# Altium PCB SSR CIRCUIT.PcbDoc
Units mm, origin at the board's own origin, x right, y up, seen from the top; angles counter-clockwise.
Board outline 150.88 x 88.77 mm, 2 copper layers (Top Layer, Bottom Layer); 40 components, 10 nets, 92 pads, 0 vias.
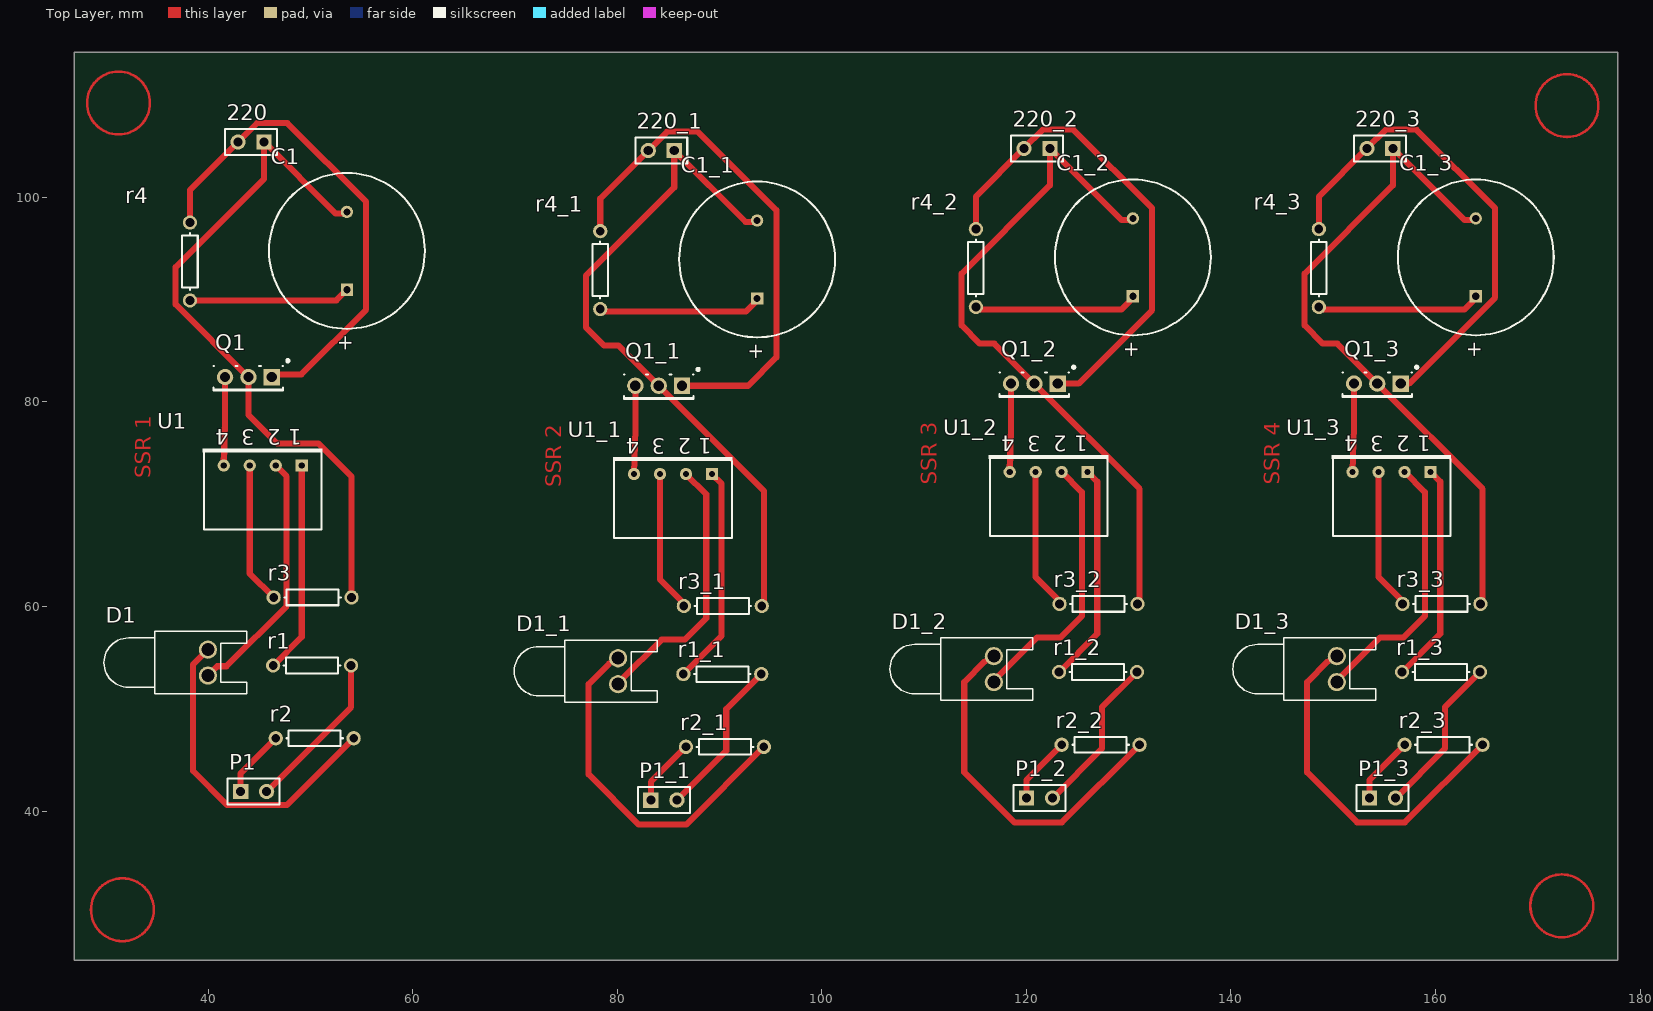
[diagram p0: Top Layer view]
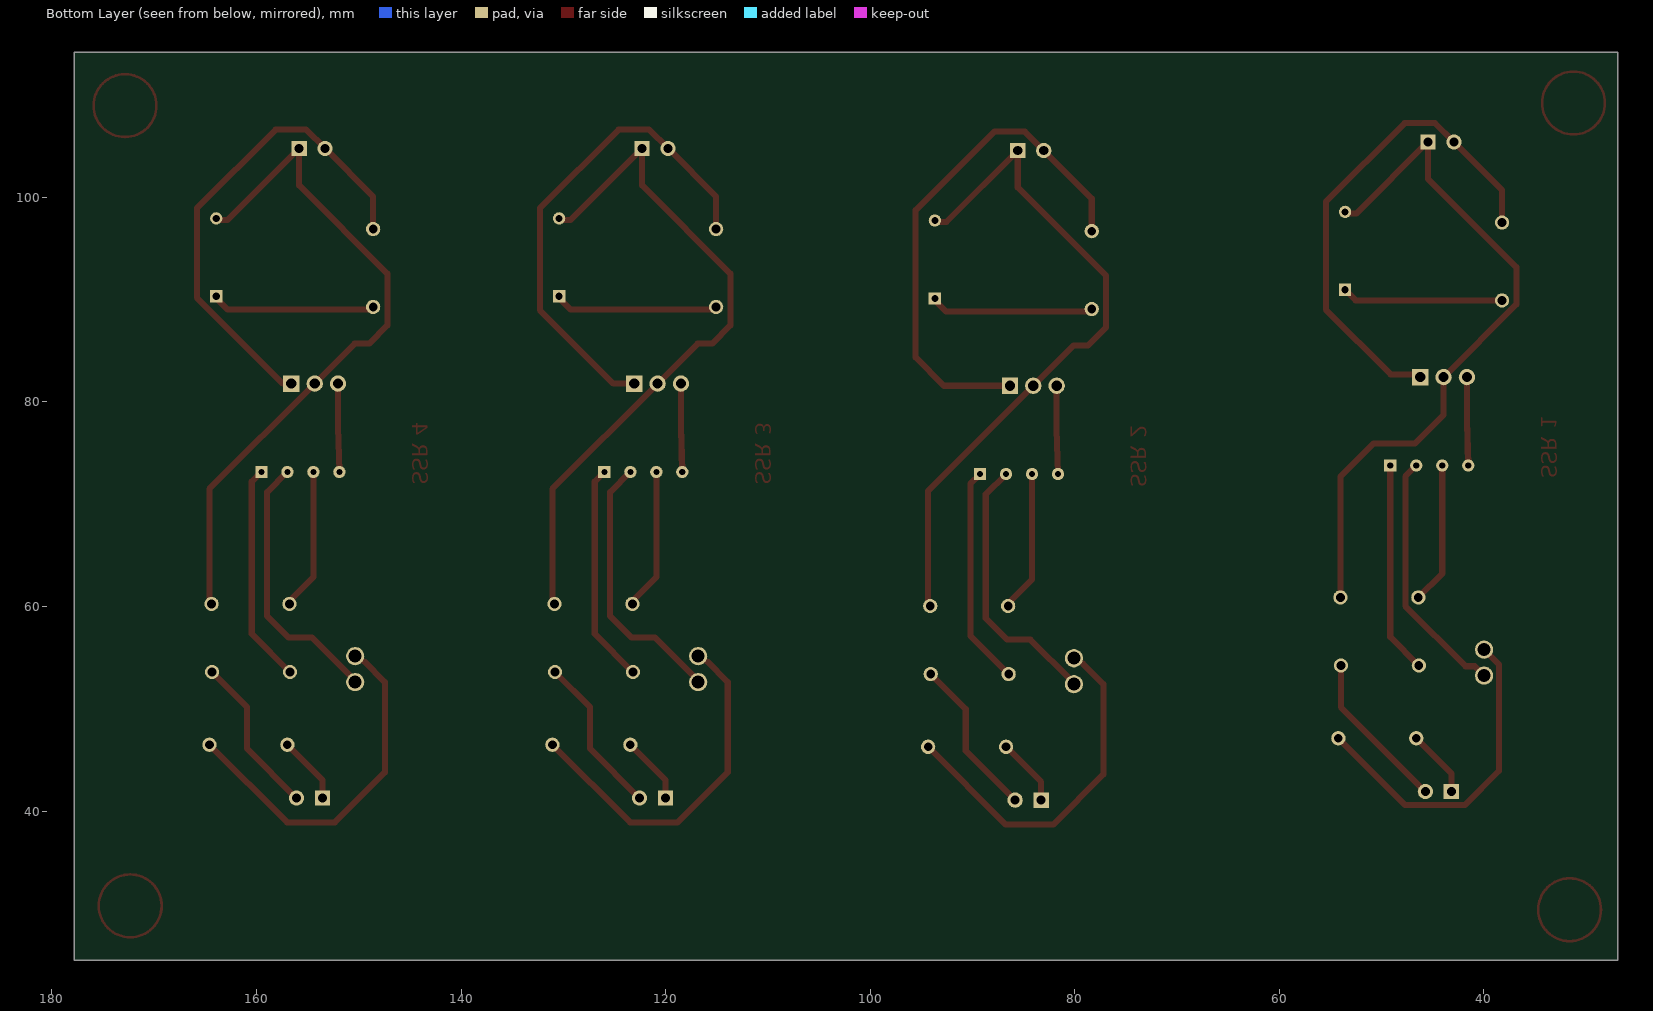
[diagram p1: Bottom Layer view, seen from below]

## Layer stack, top to bottom
Top Solder: solder mask 0.0102, Solder Resist, Dk 3.5
Top Layer: signal copper 0.0356
Dielectric 1: dielectric 0.32, FR-4, Dk 4.8
Bottom Layer: signal copper 0.0356
Bottom Solder: solder mask 0.0102, Solder Resist, Dk 3.5

## Board outline
26.924,25.4 101.727,25.4 177.8,25.4 177.8,114.173 26.924,114.173

## Design rules (kind name [scope] priority, off if disabled: settings)
Clearance [All] p1: gap=0.254
PolygonConnect [All] p1: connectstyle=Relief reliefconductorwidth=0.254 reliefentries=4 polygonreliefangle="90 Angle" airgapwidth=0.254
RoutingLayers [All] p1: top layer_v5=TRUE bottom layer_v5=FALSE
RoutingVias [All] p1: holewidth=0.711 width=1.27 viastyle="Through Hole" minholewidth=0.711 minwidth=1.27 maxholewidth=0.711 maxwidth=1.27
SolderMaskExpansion [All] p1: expansion=0.102
UnpouredPolygon [All] p1: allowunpoured=FALSE
Width [All] p1: maxlimit=0.6 minlimit=0.6 preferedwidth=0.6
28 further rules are at their usual default settings.

## Classes and differential pairs
component class Sheet1: 220 C1 D1 P1 Q1 r1 r2 r3 r4 U1

## Components (designator, comment, footprint, x,y, rotation, side; value= is the part's Value field where it differs from the comment)
220 "Header 2" HDR1X2 45.466,105.41 r180 top
220_1 "Header 2" HDR1X2 85.573,104.572 r180 top (schematic designator 220)
220_2 "Header 2" HDR1X2 122.301,104.775 r180 top (schematic designator 220)
220_3 "Header 2" HDR1X2 155.829,104.775 r180 top (schematic designator 220)
C1 "Cap Pol1" RB7.6-15 53.569,94.767 r270 top
C1_1 "Cap Pol1" RB7.6-15 93.675,93.929 r270 top (schematic designator C1)
C1_2 "Cap Pol1" RB7.6-15 130.404,94.132 r270 top (schematic designator C1)
C1_3 "Cap Pol1" RB7.6-15 163.932,94.132 r270 top (schematic designator C1)
D1 "LED0" LED-0 39.98,54.508 r270 top
D1_1 "LED0" LED-0 80.086,53.67 r270 top (schematic designator D1)
D1_2 "LED0" LED-0 116.815,53.873 r270 top (schematic designator D1)
D1_3 "LED0" LED-0 150.343,53.873 r270 top (schematic designator D1)
P1 "Header 2" HDR1X2 43.18,41.91 r0 top
P1_1 "Header 2" HDR1X2 83.287,41.072 r0 top (schematic designator P1)
P1_2 "Header 2" HDR1X2 120.015,41.275 r0 top (schematic designator P1)
P1_3 "Header 2" HDR1X2 153.543,41.275 r0 top (schematic designator P1)
Q1 "Triac" 369-03 43.942,82.423 r180 top
Q1_1 "Triac" 369-03 84.049,81.585 r180 top (schematic designator Q1)
Q1_2 "Triac" 369-03 120.777,81.788 r180 top (schematic designator Q1)
Q1_3 "Triac" 369-03 154.305,81.788 r180 top (schematic designator Q1)
r1 "Res1" AXIAL-0.3 50.165,54.229 r180 top
r1_1 "Res1" AXIAL-0.3 90.272,53.391 r180 top (schematic designator r1)
r1_2 "Res1" AXIAL-0.3 127,53.594 r180 top (schematic designator r1)
r1_3 "Res1" AXIAL-0.3 160.528,53.594 r180 top (schematic designator r1)
r2 "Res1" AXIAL-0.3 50.419,47.117 r180 top
r2_1 "Res1" AXIAL-0.3 90.526,46.279 r180 top (schematic designator r2)
r2_2 "Res1" AXIAL-0.3 127.254,46.482 r180 top (schematic designator r2)
r2_3 "Res1" AXIAL-0.3 160.782,46.482 r180 top (schematic designator r2)
r3 "Res1" AXIAL-0.3 50.216,60.884 r0 top
r3_1 "Res1" AXIAL-0.3 90.322,60.046 r0 top (schematic designator r3)
r3_2 "Res1" AXIAL-0.3 127.051,60.249 r0 top (schematic designator r3)
r3_3 "Res1" AXIAL-0.3 160.579,60.249 r0 top (schematic designator r3)
r4 "Res1" AXIAL-0.3 38.227,93.726 r270 top
r4_1 "Res1" AXIAL-0.3 78.334,92.888 r270 top (schematic designator r4)
r4_2 "Res1" AXIAL-0.3 115.062,93.091 r270 top (schematic designator r4)
r4_3 "Res1" AXIAL-0.3 148.59,93.091 r270 top (schematic designator r4)
U1 "Opto TRIAC" NPSIP4A 45.339,73.787 r180 top
U1_1 "Opto TRIAC" NPSIP4A 85.446,72.949 r180 top (schematic designator U1)
U1_2 "Opto TRIAC" NPSIP4A 122.174,73.152 r180 top (schematic designator U1)
U1_3 "Opto TRIAC" NPSIP4A 155.702,73.152 r180 top (schematic designator U1)

## Footprints (in the part's own frame and the unit in brackets; to place one, negate y for a bottom-side part, rotate by r counter-clockwise, add the part's x,y. Pads: shape width x height; smd on the part's side, far side on the other; paste and mask are expansions set on the pad)
369-03 [mm] "TO, Thru-Hole, Vertical, Heatsink Mounted; 3 In-Line Leads; Pitch 2.28 mm"
  rect 1.6x1.6 hole 1: 1(-2.28,0)
  round 1.6 hole 1: 2(0,0) 3(2.28,0)
  silkscreen extent -3.98,-1.72 3.4,1.3, body extent -3.45,-1.15 3.45,1.35, height 9.7
AXIAL-0.3 [mm] "Axial Device, Thru-Hole; 2 Leads; 0.3 in Pin Spacing"
  round 1.4 hole 0.85: 1(-3.81,0) 2(3.81,0)
  silkscreen extent -2.77,-0.76 2.77,0.76
HDR1X2 [mm] "Connector; Header; 2 Position"
  rect 1.5x1.5 hole 0.9: 1(0,0)
  round 1.5 hole 0.9: 2(2.54,0)
  silkscreen extent -1.27,-1.27 3.81,1.27
LED-0 [mil] "LED; 2 Leads"
  round 70 hole 50: 1(50,0) 2(-50,0)
  silkscreen extent -120,-400 120,150
NPSIP4A [mm] "SIP; 4 Leads; Body 10 x 11.5 x 7.5 mm (typ); Pitch 2.54 mm"
  rect 1.2x1.2 hole 0.6: 1(-3.81,0)
  round 1.2 hole 0.6: 2(-1.27,0) 3(1.27,0) 4(3.81,0)
  silkscreen extent -5.83,-1.65 5.87,6.25
RB7.6-15 [mm] "Polarized Capacitor (Radial); 2 Leads"
  rect 1.2x1.2 hole 0.7: 1(3.81,0)
  round 1.2 hole 0.7: 2(-3.81,0)
  silkscreen extent -7.62,-7.62 7.62,7.62

## Part data
220 220_1 220_2 220_3 P1 P1_1 P1_2 P1_3: "Header, 2-Pin"
C1 C1_1 C1_2 C1_3: "Polarized Capacitor (Radial)"
D1 D1_1 D1_2 D1_3: "Typical INFRARED GaAs LED"
Q1 Q1_1 Q1_2 Q1_3: "Silicon Bidirectional Triode Thyristor"
r1 r1_1 r1_2 r1_3 r2 r2_1 r2_2 r2_3 r3 r3_1 r3_2 r3_3 r4 r4_1 r4_2 r4_3: "Resistor"
U1 U1_1 U1_2 U1_3: "Opto-Triac"

## Nets (pads, with @x,y where several pads share a name; then routed paths per layer and width w, separated by ;. In a path a pad name is that pad's centre, name@x,y a point inside that pad or via, vN(x,y) a via of type N, cw(c..) or ccw(c..) an arc to the next point about the centre after c; other vN are vias at no path point)
Net220_1: 220.1 C1.2 Q1.2 r3.2 | length 68.8
  Top Layer w0.6: C1.2 53.594,98.577 53.594,98.425 52.451,98.425 220.1 45.466,101.803 36.83,93.167 36.83,89.535 Q1.2 43.942,78.74 46.761,75.921 50.8,75.921 54.026,72.695 r3.2
Net220_2: 220.2 Q1.1 r4.1 | length 48.8
  Top Layer w0.554: Q1.1 Q1.1@46.492,82.693
  Top Layer w0.6: r4.1 38.227,100.711 220.2 44.78,107.264 47.752,107.264 55.448,99.568 55.448,89.027 49.114,82.693 Q1.1@46.492,82.693
NetC1_1: C1.1 r4.2 | length 15.8
  Top Layer w0.6: r4.2 52.527,89.916 C1.1
NetD1_1: D1.1 U1.2 | length 24.7
  Top Layer w0.6: D1.1 40.894,54.153 41.783,54.153 47.676,60.046 47.676,72.72 U1.2
NetD1_2: D1.2 r2.1 | length 32.2
  Top Layer w0.6: D1.2 38.532,54.331 38.532,43.917 41.859,40.589 47.701,40.589 r2.1
NetP1_1: P1.1 r2.2 | length 6.6
  Top Layer w0.6: P1.1 43.18,43.688 r2.2
NetP1_2: P1.2 r1.1 | length 15.7
  Top Layer w0.6: P1.2 53.975,50.165 r1.1
NetQ1_3: Q1.3 U1.4 | length 8.6
  Top Layer w0.6: U1.4 41.662,78.238 Q1.3
Netr1_2: r1.2 U1.1 | length 20.7
  Top Layer w0.6: r1.2 49.149,57.023 U1.1
Netr3_1: r3.1 U1.3 | length 13.9
  Top Layer w0.6: U1.3 44.069,63.221 r3.1
pads on no net: 220_1.1 220_1.2 220_2.1 220_2.2 220_3.1 220_3.2 C1_1.1 C1_1.2 C1_2.1 C1_2.2 C1_3.1 C1_3.2 D1_1.1 D1_1.2 D1_2.1 D1_2.2 D1_3.1 D1_3.2 P1_1.1 P1_1.2 P1_2.1 P1_2.2 P1_3.1 P1_3.2 Q1_1.1 Q1_1.2 Q1_1.3 Q1_2.1 Q1_2.2 Q1_2.3 Q1_3.1 Q1_3.2 Q1_3.3 r1_1.1 r1_1.2 r1_2.1 r1_2.2 r1_3.1 r1_3.2 r2_1.1 r2_1.2 r2_2.1 r2_2.2 r2_3.1 r2_3.2 r3_1.1 r3_1.2 r3_2.1 r3_2.2 r3_3.1 r3_3.2 r4_1.1 r4_1.2 r4_2.1 r4_2.2 r4_3.1 r4_3.2 U1_1.1 U1_1.2 U1_1.3 U1_1.4 U1_2.1 U1_2.2 U1_2.3 U1_2.4 U1_3.1 U1_3.2 U1_3.3 U1_3.4
copper on no net: | length 853.3
  Top Layer w0.254: 34.314,109.22 ccw(c31.242,109.22) 34.314,109.22 ; 34.695,30.353 ccw(c31.623,30.353) 34.695,30.353 ; 175.411,30.734 ccw(c172.339,30.734) 175.411,30.734 ; 175.919,108.966 ccw(c172.847,108.966) 175.919,108.966
  Top Layer w0.6: 78.334,88.824 92.558,88.824 93.472,89.738 ; 78.334,96.444 78.334,99.873 83.033,104.572 84.887,106.426 87.859,106.426 95.555,98.73 95.555,84.353 92.786,81.585 86.329,81.585 ; 79.21,54.419 77.191,52.4 77.191,43.586 82.093,38.684 86.741,38.684 94.336,46.279 ; 79.756,52.73 80.289,52.73 84.328,56.769 86.614,56.769 88.697,58.852 88.697,70.968 86.716,72.949 ; 81.636,72.949 81.769,77.4 81.769,81.585 ; 83.287,41.072 83.287,42.85 86.716,46.279 ; 84.176,72.949 84.176,62.662 86.716,60.122 ; 85.827,41.072 90.653,45.898 90.653,49.962 94.082,53.391 ; 86.462,53.391 90.195,57.125 90.195,72.009 89.256,72.949 ; 93.701,97.587 92.558,97.587 85.573,104.572 85.573,100.965 76.937,92.329 76.937,87.274 78.715,85.496 80.137,85.496 84.049,81.585 94.336,71.298 94.336,60.122 ; 115.062,89.027 129.286,89.027 130.2,89.941 ; 115.062,96.647 115.062,100.076 119.761,104.775 121.615,106.629 124.587,106.629 132.283,98.933 132.283,88.976 125.095,81.788 123.057,81.788 ; 115.938,54.623 113.919,52.603 113.919,43.79 118.821,38.887 123.469,38.887 131.064,46.482 ; 116.484,52.934 117.018,52.934 121.056,56.972 123.342,56.972 125.425,59.055 125.425,71.171 123.444,73.152 ; 118.364,73.152 118.497,77.603 118.497,81.788 ; 120.015,41.275 120.015,43.053 123.444,46.482 ; 120.904,73.152 120.904,62.865 123.444,60.325 ; 122.555,41.275 127.381,46.101 127.381,50.165 130.81,53.594 ; 123.19,53.594 126.924,57.328 126.924,72.212 125.984,73.152 ; 130.429,97.79 129.286,97.79 122.301,104.775 122.301,101.168 113.665,92.532 113.665,87.478 115.443,85.7 116.865,85.7 120.777,81.788 131.064,71.501 131.064,60.325 ; 148.59,89.027 162.814,89.027 163.728,89.941 ; 148.59,96.647 148.59,100.076 153.289,104.775 155.143,106.629 158.115,106.629 165.811,98.933 165.811,90.195 157.404,81.788 156.585,81.788 ; 149.466,54.623 147.447,52.603 147.447,43.79 152.349,38.887 156.997,38.887 164.592,46.482 ; 150.012,52.934 150.546,52.934 154.584,56.972 156.87,56.972 158.953,59.055 158.953,71.171 156.972,73.152 ; 151.892,73.152 152.025,77.603 152.025,81.788 ; 153.543,41.275 153.543,43.053 156.972,46.482 ; 154.432,73.152 154.432,62.865 156.972,60.325 ; 156.083,41.275 160.909,46.101 160.909,50.165 164.338,53.594 ; 156.718,53.594 160.452,57.328 160.452,72.212 159.512,73.152 ; 163.957,97.79 162.814,97.79 155.829,104.775 155.829,101.168 147.193,92.532 147.193,87.478 148.971,85.7 150.393,85.7 154.305,81.788 164.592,71.501 164.592,60.325

## Other copper
Top Layer:
  text "SSR 1" at 34.417,72.517 h1.52 r90
  text "SSR 3" at 111.252,71.882 h1.52 r90
  text "SSR 4" at 144.78,71.882 h1.52 r90
  text "SSR 2" at 74.524,71.679 h1.52 r90

## Text inside footprints (layer, text, board x,y; h text height)
C1: Top Overlay "+" at 52.832,86.636 h1.5 r270
C1_1: Top Overlay "+" at 92.938,85.797 h1.5 r270
C1_2: Top Overlay "+" at 129.667,86.001 h1.5 r270
C1_3: Top Overlay "+" at 163.195,86.001 h1.5 r270
U1: Top Overlay "4" at 42.037,77.307 h1.5 r180; Top Overlay "3" at 44.577,77.307 h1.5 r180; Top Overlay "2" at 47.117,77.307 h1.5 r180; Top Overlay "1" at 49.149,77.307 h1.5 r180
U1_1: Top Overlay "4" at 82.144,76.469 h1.5 r180; Top Overlay "3" at 84.684,76.469 h1.5 r180; Top Overlay "2" at 87.224,76.469 h1.5 r180; Top Overlay "1" at 89.256,76.469 h1.5 r180
U1_2: Top Overlay "4" at 118.872,76.672 h1.5 r180; Top Overlay "3" at 121.412,76.672 h1.5 r180; Top Overlay "2" at 123.952,76.672 h1.5 r180; Top Overlay "1" at 125.984,76.672 h1.5 r180
U1_3: Top Overlay "4" at 152.4,76.672 h1.5 r180; Top Overlay "3" at 154.94,76.672 h1.5 r180; Top Overlay "2" at 157.48,76.672 h1.5 r180; Top Overlay "1" at 159.512,76.672 h1.5 r180